# EAGLE board PCB_OpenBook (EAGLE 9.7.0)
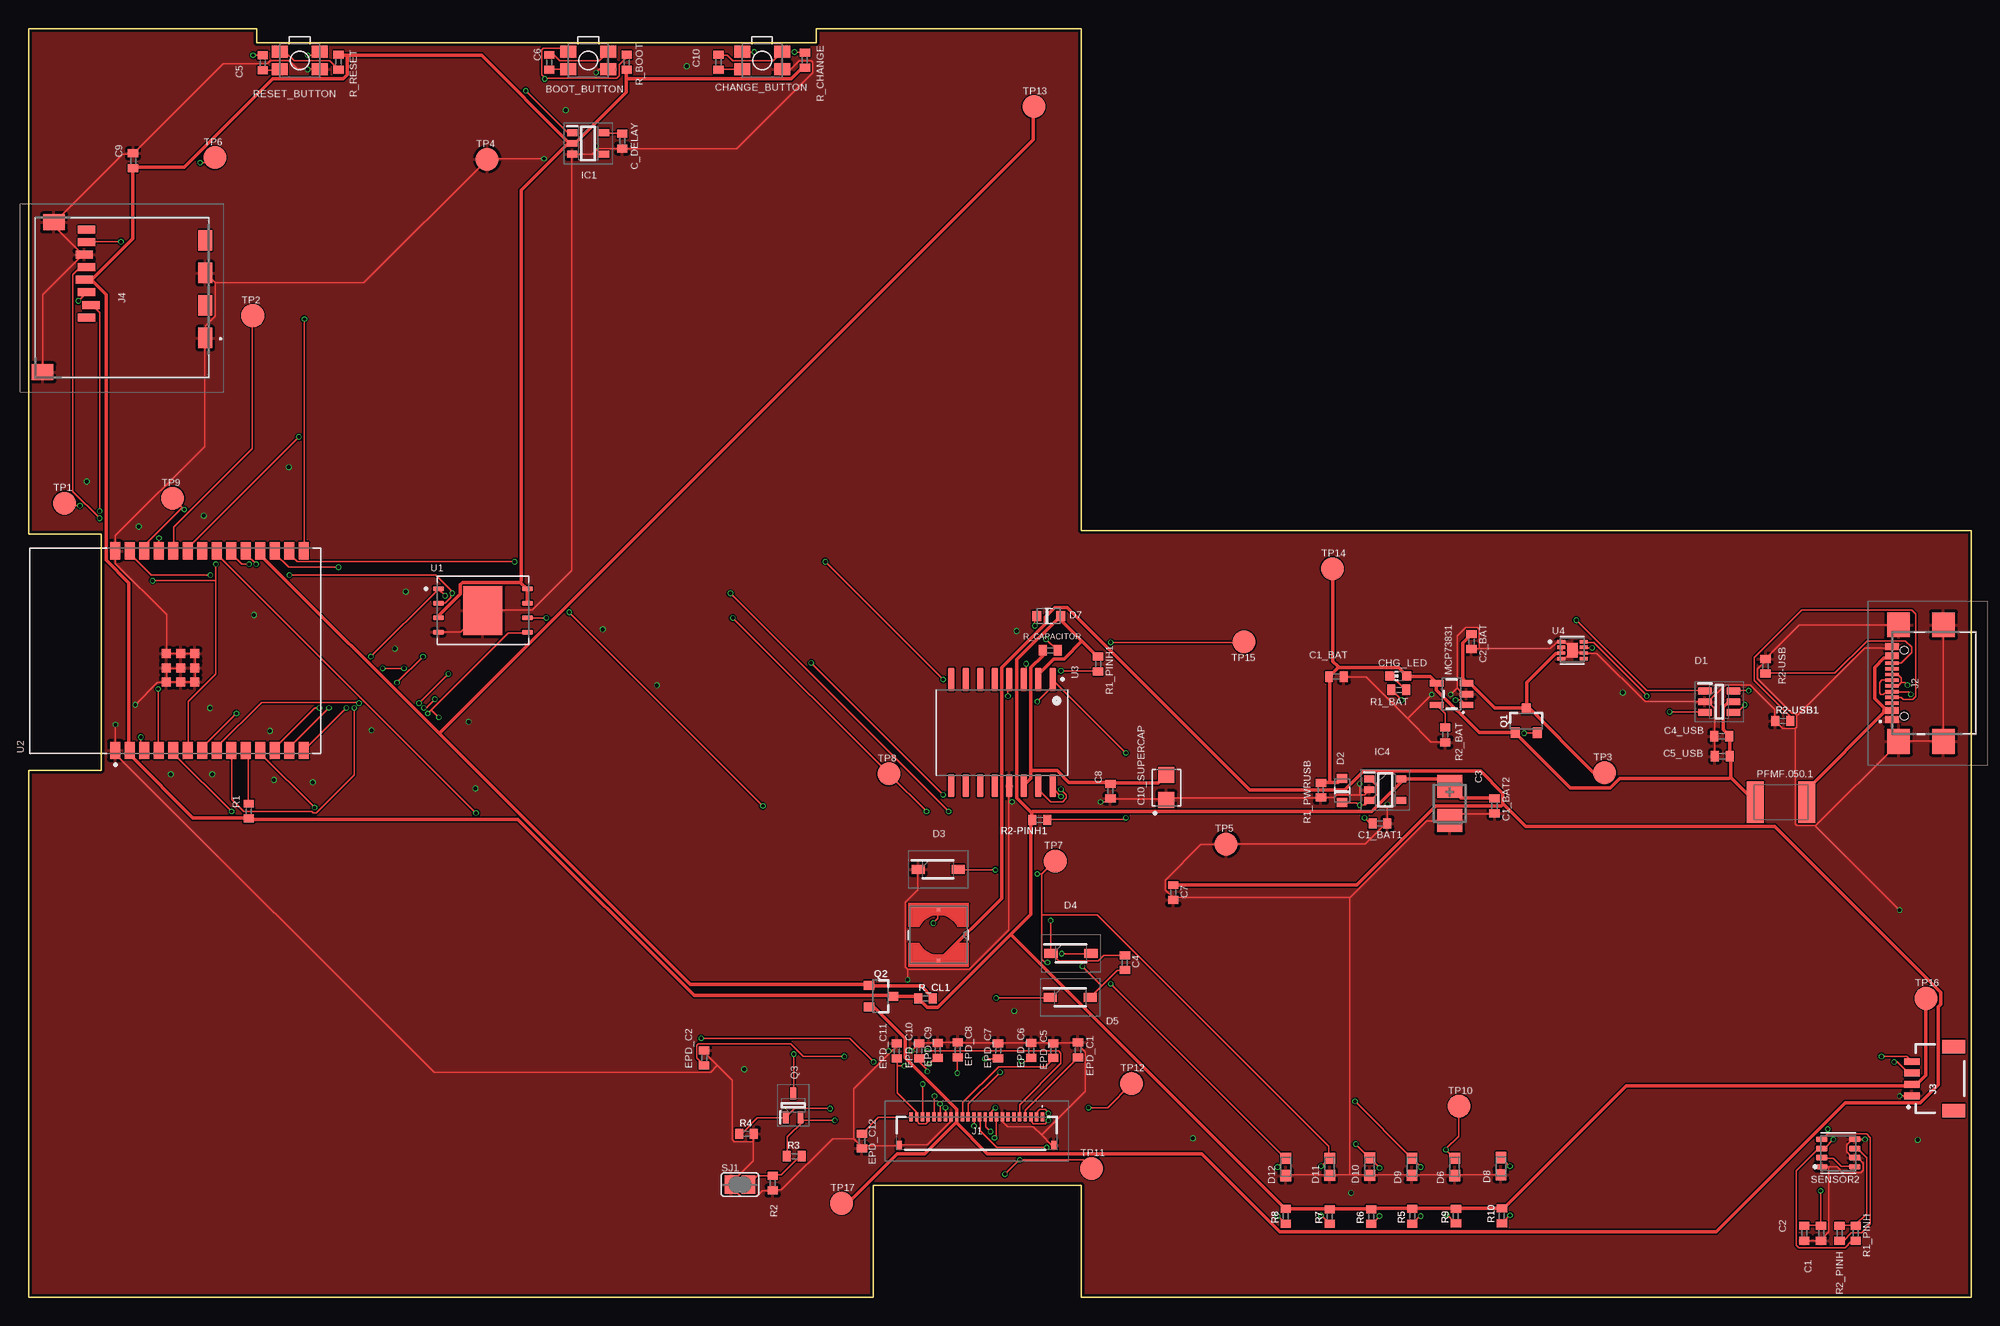
[diagram p0: board, top side]
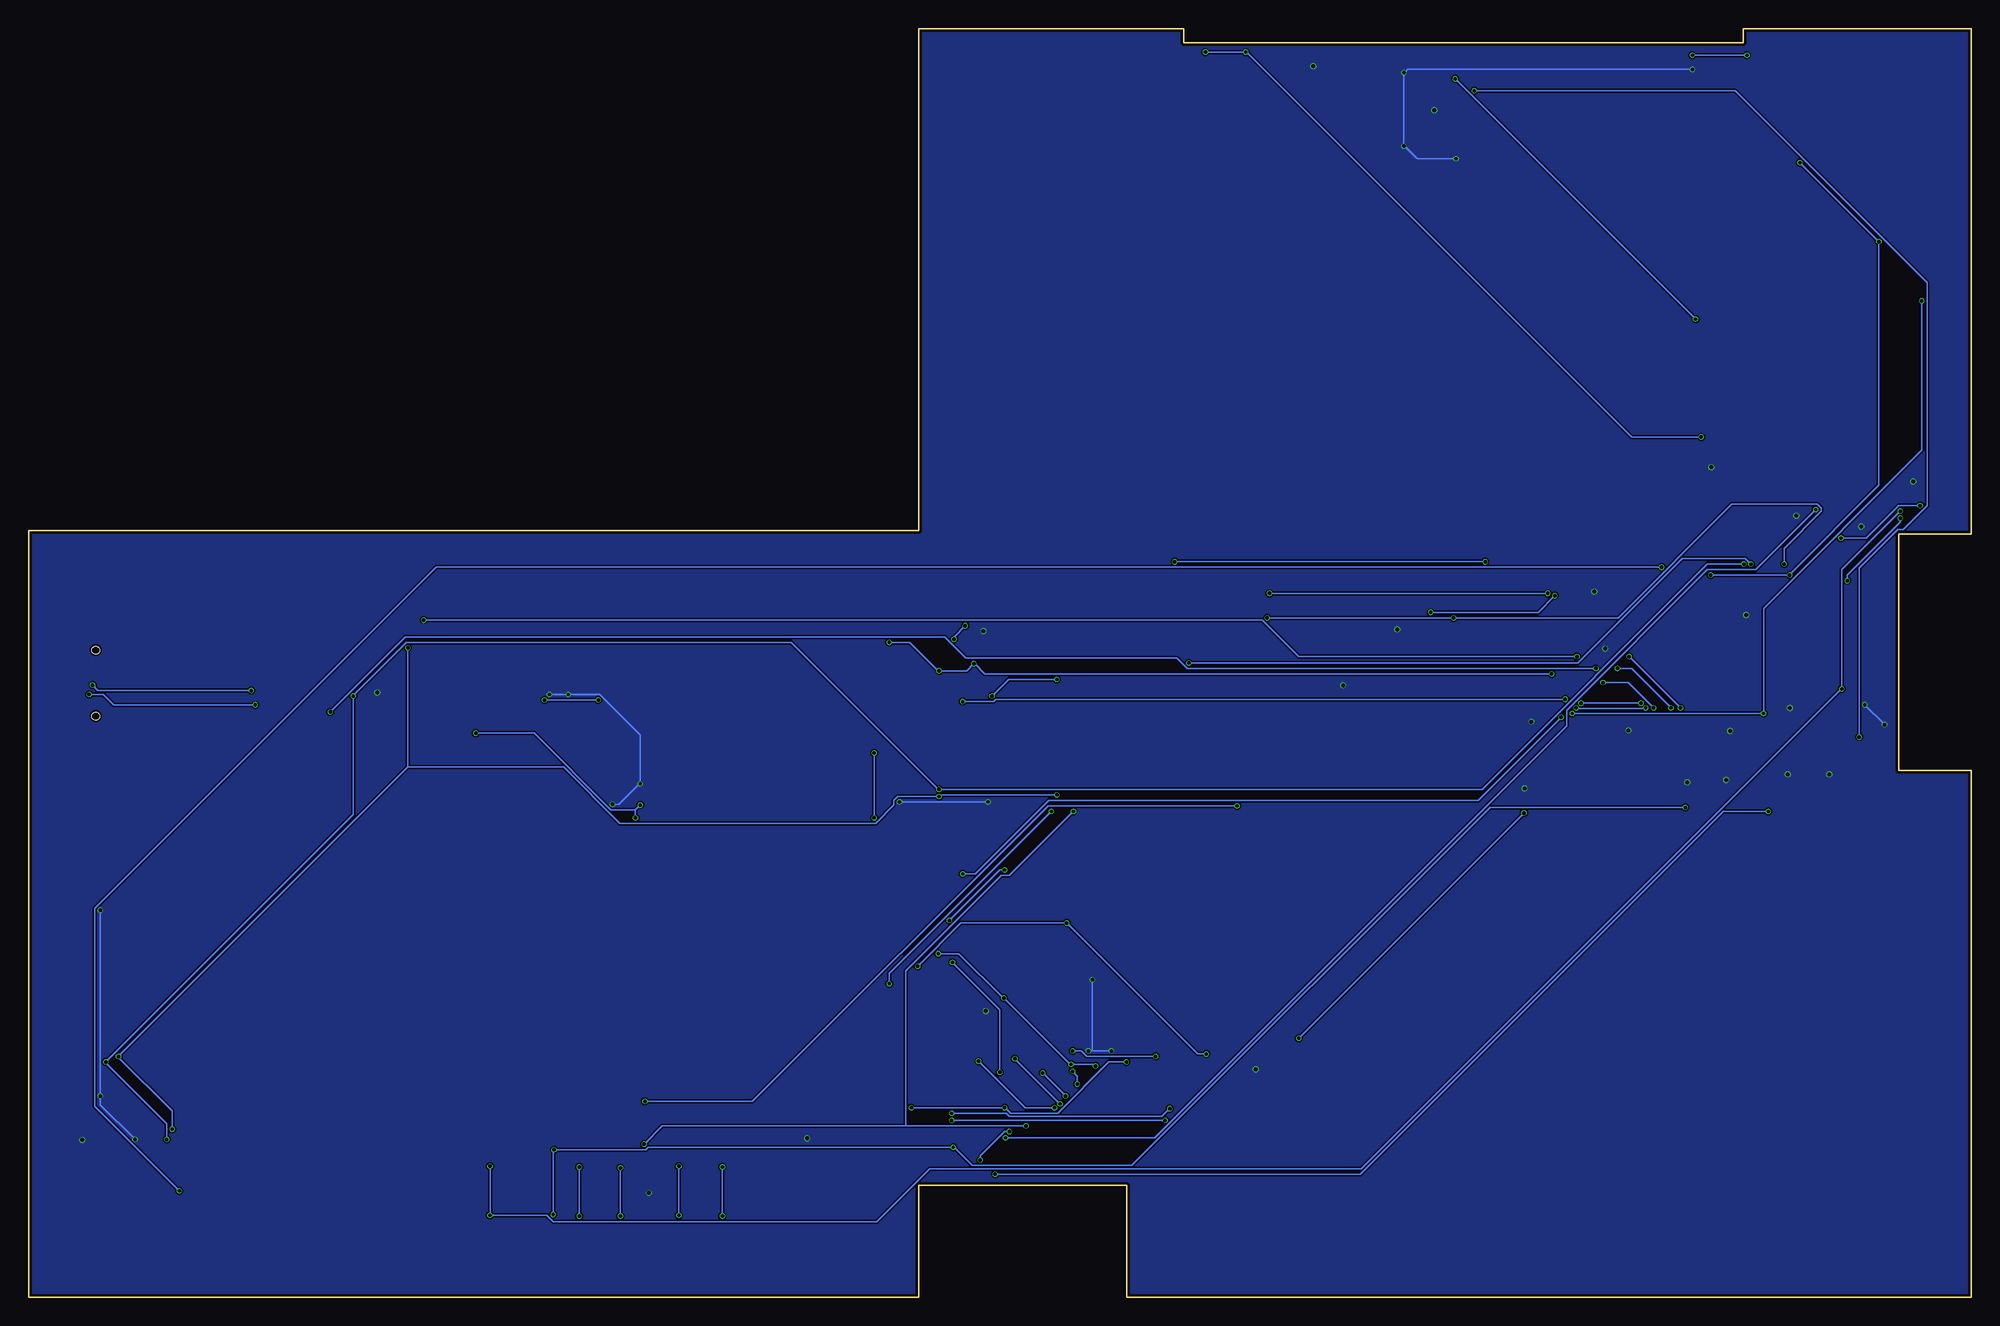
[diagram p1: board, bottom side, seen from below]

Size 170.2 x 111.2 mm. Coordinates in mm from the lower left corner, seen from the top.
Outline: 0,0 74,0 74,9.85 92.2,9.85 92.2,0 170.2,0 170.2,67.2 92.2,67.2 92.2,111.2 69.02,111.2 69.02,109.95 19.97,109.95 19.97,111.2 0,111.2 0,66.9 6.35,66.9 6.35,46.19 0,46.19 0,0
Copper layers (1*16): Top 0.035mm / dielectric 1.6mm / Bottom 0.035mm
Design rules "jlcpcb-2layers.dru": minimum track width 5mil, minimum drill 0.3mm, track to track 5mil, track to pad 5mil, pad to pad 5mil, via to via 5mil, smd to smd 5mil, copper to edge 0.2mm, drill to drill 6mil, minimum pad ring 10mil, minimum via ring 3mil, stop-mask expansion 4mil, vias tented up to drill 0mil, thermal gap 10mil
Net classes: 0 default: width 0.15 mm; 1 POWER: width 0.3 mm

## Footprints (pad centres in the part's own frame; a part is rotated, then mirrored left to right if it is on the bottom)
MYBUTTON = smd 1.4 x 1.05: 1 1.75,0.75; 2 -1.75,0.75; 3 -1.75,-0.75; 4 1.75,-0.75
ESP32_WROVER_EAGLE-LTSPICE_C0402 = smd 0.7 x 0.9: 1 -0.65,0; 2 0.65,0
RCL_CT3528 = smd 2 x 2.2: + -1.5,0; - 1.5,0
CAPCP3225X100N = smd 1.4 x 1.4: 1 -1.1,0; 2 1.1,0
ADAFRUIT_CHIP-LED0603 = smd 0.8 x 0.8: A 0,-0.75; C 0,0.75
SOT95P280X145-6N = smd 1.2 x 0.6: 1 -1.25,0.95; 2 -1.25,0; 3 -1.25,-0.95; 4 1.25,-0.95; 5 1.25,0; 6 1.25,0.95
ESP32_WROVER_AVX---SD0805S020S1R0_AVX_SD0805S020S1R0_0 = smd 0.8 x 0.9: 1 -1.05,0; 2 1.05,0
SOD3716X135N = smd 1.15 x 0.8: 1 -1.75,0; 2 1.75,0
DIOC1608X36N = smd 0.97 x 0.94: 1 -0.75,0; 2 0.75,0
SOT95P280X120-5N = smd 0.9 x 0.6: 1 -1.4,0.95; 2 -1.4,0; 3 -1.4,-0.95; 4 1.4,-0.95; 5 1.4,0.95
FH34SRJ24S05SH99 = smd 0.3 x 0.8: 1 5.75,1.45; 2 5.25,1.45; 3 4.75,1.45; 4 4.25,1.45; 5 3.75,1.45; 6 3.25,1.45; 7 2.75,1.45; 8 2.25,1.45; 9 1.75,1.45; 10 1.25,1.45; 11 0.75,1.45; 12 0.25,1.45; 13 -0.25,1.45; 14 -0.75,1.45; 15 -1.25,1.45; 16 -1.75,1.45; 17 -2.25,1.45; 18 -2.75,1.45; 19 -3.25,1.45; 20 -3.75,1.45; 21 -4.25,1.45; 22 -4.75,1.45; 23 -5.25,1.45; 24 -5.75,1.45 | smd 0.4 x 0.8: MP1 6.75,-1.05; MP2 -6.75,-1.05
SAMACSYS_PARTS_USB4110GFA = smd 0.3 x 1.15: A1 -3.35,3.678; A4 -2.55,3.678; A5 -1.25,3.678; A6 -0.25,3.678; A7 0.25,3.678; A8 1.25,3.678; A9 2.55,3.678; A12 3.35,3.678; B1 3.05,3.678; B4 2.25,3.678; B5 1.75,3.678; B6 0.75,3.678; B7 -0.75,3.678; B8 -1.75,3.678; B9 -2.25,3.678; B12 -3.05,3.678 | smd 2.18 x 2: MP1 -5.11,-0.827; MP2 5.11,-0.827; MP3 -5.11,3.103; MP4 5.11,3.103 | hole 0.65: -2.89,2.603; 2.89,2.603
JST04_1MM_RA = smd 0.6 x 1.35: 1 -1.5,0; 2 -0.5,0; 3 0.5,0; 4 1.5,0 | smd 1.2 x 2: NC1 2.8,-3.675; NC2 -2.8,-3.675
112ATAARR03ATTEND = smd 1.8 x 1.2: G1 10.6,10.4; G2 4.9,10.4; S1 7.75,10.4; S2 2.05,10.4 | smd 1.4 x 1.9: G3 13.6,-3.85; G4 0.45,-2.85 | smd 0.7 x 1.5: P1 8.8,0; P2 7.7,0.4; P3 6.6,0; P4 5.5,-0.2; P5 4.4,0; P6 3.3,-0.2; P7 2.2,0; P8 1.1,0
IND_4828-WE-TPC_WRE = smd 0.33 x 0.33: 1 -2.286,0; 2 2.286,0
ESP32_WROVER_SPARKFUN-IC-POWER_SOT23-5 = smd 0.55 x 1.2: 1 -0.95,-1.3; 2 0,-1.3; 3 0.95,-1.3; 4 0.95,1.3; 5 -0.95,1.3
ESP32C6_VARISTOR_CT/CN1812 = smd 1.5 x 3.6: 1 -2.25,0; 2 2.25,0
ESP32_WROVER_SPARKFUN-DISCRETESEMI_SOT23-3 = smd 0.8 x 0.9: 1 -0.95,-1; 2 0.95,-1; 3 0,1.1
SOT65P210X110-3N = smd 1.05 x 0.5: 1 -1.05,0.65; 2 -1.05,-0.65; 3 1.05,0
ESP32_WROVER_EAGLE-LTSPICE_R0402 = smd 0.7 x 0.9: 1 -0.65,0; 2 0.65,0
ESP32_WROVER_BME680_PSON80P300X300X100-8N = smd 1.016 x 0.5: 1 1.458,1.2; 2 1.458,0.4; 3 1.458,-0.4; 4 1.458,-1.2; 5 -1.458,-1.22; 6 -1.458,-0.4; 7 -1.458,0.4; 8 -1.458,1.2
SJ = smd 1.168 x 1.6: 1 -0.762,0; 2 0.762,0
TP20R = smd 2 x 2: TP 0,0
SON127P600X800X80-9N = smd 0.94 x 0.44: 1 -3.895,1.905; 2 -3.895,0.635; 3 -3.895,-0.635; 4 -3.895,-1.905; 5 3.895,-1.905; 6 3.895,-0.635; 7 3.895,0.635; 8 3.895,1.905 | smd 3.4 x 4.3: 9 0,0
XCVR_ESP32-C6-WROOM-1-N8 = smd 1.5 x 0.9: 1 -8.75,5.26; 2 -8.75,3.99; 3 -8.75,2.72; 4 -8.75,1.45; 5 -8.75,0.18; 6 -8.75,-1.09; 7 -8.75,-2.36; 8 -8.75,-3.63; 9 -8.75,-4.9; 10 -8.75,-6.17; 11 -8.75,-7.44; 12 -8.75,-8.71; 13 -8.75,-9.98; 14 -8.75,-11.25; 15 8.75,-11.25; 16 8.75,-9.98; 17 8.75,-8.71; 18 8.75,-7.44; 19 8.75,-6.17; 20 8.75,-4.9; 21 8.75,-3.63; 22 8.75,-2.36; 23 8.75,-1.09; 24 8.75,0.18; 25 8.75,1.45; 26 8.75,2.72; 27 8.75,3.99; 28 8.75,5.26 | smd 0.8 x 0.8: 29_1 -2.755,0.79; 29_2 -1.505,0.79; 29_3 -0.255,0.79; 29_4 -2.755,-0.46; 29_5 -1.505,-0.46; 29_6 -0.255,-0.46; 29_7 -2.755,-1.71; 29_8 -1.505,-1.71; 29_9 -0.255,-1.71
SOIC127P1032X265-16N = smd 2.05 x 0.59: 1 -4.655,4.445; 2 -4.655,3.175; 3 -4.655,1.905; 4 -4.655,0.635; 5 -4.655,-0.635; 6 -4.655,-1.905; 7 -4.655,-3.175; 8 -4.655,-4.445; 9 4.655,-4.445; 10 4.655,-3.175; 11 4.655,-1.905; 12 4.655,-0.635; 13 4.655,0.635; 14 4.655,1.905; 15 4.655,3.175; 16 4.655,4.445
SON50P200X200X80-9N = smd 0.76 x 0.27: 1 -0.985,0.75; 2 -0.985,0.25; 3 -0.985,-0.25; 4 -0.985,-0.75; 5 0.985,-0.75; 6 0.985,-0.25; 7 0.985,0.25; 8 0.985,0.75 | smd 0.9 x 1.3: 9 0,0

## Placement (x,y rotation side)
BOOT_BUTTON  BUTTON_CUSYOMV1  [MYBUTTON]  49.03,108.4 180 top
C1  100nF  [ESP32_WROVER_EAGLE-LTSPICE_C0402]  157.03,5.62 270 top
C1_BAT  4.7uF  [ESP32_WROVER_EAGLE-LTSPICE_C0402]  114.57,54.4 0 top
C1_BAT1  4.7uF  [ESP32_WROVER_EAGLE-LTSPICE_C0402]  118.39,41.54 0 top
C1_BAT2  4.7uF  [ESP32_WROVER_EAGLE-LTSPICE_C0402]  128.42,43.07 270 top
C2  100nF  [ESP32_WROVER_EAGLE-LTSPICE_C0402]  155.55,5.62 270 top
C2_BAT  4.7uF  [ESP32_WROVER_EAGLE-LTSPICE_C0402]  126.4,57.47 270 top
C3  100uF TANT  [RCL_CT3528]  124.5,43.29 270 top
C4  4.7uF/25V  [ESP32_WROVER_EAGLE-LTSPICE_C0402]  96.04,29.34 270 top
C4_USB  100nF  [ESP32_WROVER_EAGLE-LTSPICE_C0402]  148.33,49.18 180 top
C5  1uF  [ESP32_WROVER_EAGLE-LTSPICE_C0402]  20.51,108.19 270 top
C5_USB  4.7uF  [ESP32_WROVER_EAGLE-LTSPICE_C0402]  148.37,47.43 180 top
C6  100nF  [ESP32_WROVER_EAGLE-LTSPICE_C0402]  45.62,108.23 270 top
C7  10uF  [ESP32_WROVER_EAGLE-LTSPICE_C0402]  100.28,35.48 270 top
C8  100nF  [ESP32_WROVER_EAGLE-LTSPICE_C0402]  94.77,44.37 270 top
C9  100nF  [ESP32_WROVER_EAGLE-LTSPICE_C0402]  9.16,99.61 90 top
C10  100nF  [ESP32_WROVER_EAGLE-LTSPICE_C0402]  60.44,108.25 270 top
C10_SUPERCAP  CPH3225A  [CAPCP3225X100N]  99.68,44.68 90 top
C_DELAY  100nF  [ESP32_WROVER_EAGLE-LTSPICE_C0402]  52,101.33 270 top
CHANGE_BUTTON  BUTTON_CUSYOMV1  [MYBUTTON]  64.26,108.4 180 top
CHG_LED  [ADAFRUIT_CHIP-LED0603]  119.98,54.46 90 top
D1  USBLC6-2SC6Y  [SOT95P280X145-6N]  148.1,52.2 0 top
D2  ESP32_WROVER_AVX---SD0805S020S1R0_AVX_SD0805S020S1R0_0_0AVX_SD0805S020S1R0_0_0  [ESP32_WROVER_AVX---SD0805S020S1R0_AVX_SD0805S020S1R0_0]  115.07,44.43 90 top
D3  MBR0530  [SOD3716X135N]  79.68,37.51 0 top
D4  MBR0530  [SOD3716X135N]  91.32,30.16 0 top
D5  MBR0530  [SOD3716X135N]  91.25,26.29 0 top
D6  PGB1010603MR  [DIOC1608X36N]  124.93,11.43 90 top
D7  ESP32_WROVER_AVX---SD0805S020S1R0_AVX_SD0805S020S1R0_0_0AVX_SD0805S020S1R0_0_0  [ESP32_WROVER_AVX---SD0805S020S1R0_AVX_SD0805S020S1R0_0]  89.37,59.72 0 top
D8  PGB1010603MR  [DIOC1608X36N]  128.98,11.51 90 top
D9  PGB1010603MR  [DIOC1608X36N]  121.18,11.44 90 top
D10  PGB1010603MR  [DIOC1608X36N]  117.48,11.47 90 top
D11  PGB1010603MR  [DIOC1608X36N]  113.98,11.45 90 top
D12  PGB1010603MR  [DIOC1608X36N]  110.13,11.43 90 top
EPD_C1  1uF/50V  [ESP32_WROVER_EAGLE-LTSPICE_C0402]  91.93,21.69 90 top
EPD_C2  1uF/50V  [ESP32_WROVER_EAGLE-LTSPICE_C0402]  59.18,21 90 top
EPD_C5  0.1uF/50V  [ESP32_WROVER_EAGLE-LTSPICE_C0402]  89.77,21.63 90 top
EPD_C6  1uF/50V  [ESP32_WROVER_EAGLE-LTSPICE_C0402]  87.83,21.65 90 top
EPD_C7  1uF/50V  [ESP32_WROVER_EAGLE-LTSPICE_C0402]  84.93,21.62 90 top
EPD_C8  1uF/50V  [ESP32_WROVER_EAGLE-LTSPICE_C0402]  81.4,21.7 90 top
EPD_C9  1uF/50V  [ESP32_WROVER_EAGLE-LTSPICE_C0402]  79.65,21.66 90 top
EPD_C10  1uF/50V  [ESP32_WROVER_EAGLE-LTSPICE_C0402]  78.03,21.62 90 top
EPD_C11  1uF/50V  [ESP32_WROVER_EAGLE-LTSPICE_C0402]  76.06,21.6 90 top
EPD_C12  1uF/50V  [ESP32_WROVER_EAGLE-LTSPICE_C0402]  73.01,13.7 270 top
IC1  XC6220A331MR-G  [SOT95P280X120-5N]  49.02,101.13 0 top
IC4  XC6220A331MR-G  [SOT95P280X120-5N]  118.85,44.49 0 top
J1  FH34SRJ-24S-0.5SH_99_  [FH34SRJ24S05SH99]  83.06,14.39 0 top
J2  SAMACSYS_PARTS_USB4110-GF-A  [SAMACSYS_PARTS_USB4110GFA]  166.92,53.84 90 top
J3  QWIIC_RIGHT_ANGLE  [JST04_1MM_RA]  164.97,19.17 90 top
J4  112A-TAAR-R03_ATTEND  [112ATAARR03ATTEND]  5.08,94.68 270 top
L1  68uH  [IND_4828-WE-TPC_WRE]  79.71,31.77 270 top
MCP73831  ESP32_WROVER_SPARKFUN-IC-POWER_MCP73831  [ESP32_WROVER_SPARKFUN-IC-POWER_SOT23-5]  124.66,52.87 90 top
PFMF.050.1  ESP32C6_VARISTORCN1812  [ESP32C6_VARISTOR_CT/CN1812]  153.51,43.4 180 top
Q1  20V/4.2A/52mΩ/1.4W  [ESP32_WROVER_SPARKFUN-DISCRETESEMI_SOT23-3]  131.2,50.5 0 top
Q2  20V/4.2A/52mΩ/1.4W  [ESP32_WROVER_SPARKFUN-DISCRETESEMI_SOT23-3]  74.63,26.4 270 top
Q3  SI1308EDL-T1-GE3  [SOT65P210X110-3N]  66.98,16.83 90 top
R1  10K  [ESP32_WROVER_EAGLE-LTSPICE_R0402]  19.3,42.62 90 top
R1_BAT  200  [ESP32_WROVER_EAGLE-LTSPICE_R0402]  120.04,53.25 0 top
R1_PINH  10K  [ESP32_WROVER_EAGLE-LTSPICE_R0402]  160.07,5.62 90 top
R1_PINH1  10K  [ESP32_WROVER_EAGLE-LTSPICE_R0402]  93.69,55.51 90 top
R1_PWRUSB  100K  [ESP32_WROVER_EAGLE-LTSPICE_R0402]  113.21,44.45 90 top
R2  2.2  [ESP32_WROVER_EAGLE-LTSPICE_R0402]  65.19,10.02 90 top
R2-PINH1  10K  [ESP32_WROVER_EAGLE-LTSPICE_R0402]  88.58,41.85 180 top
R2-USB  5k1  [ESP32_WROVER_EAGLE-LTSPICE_R0402]  152.16,55.31 90 top
R2-USB1  5k1  [ESP32_WROVER_EAGLE-LTSPICE_R0402]  153.66,50.52 0 top
R2_BAT  2K  [ESP32_WROVER_EAGLE-LTSPICE_R0402]  124.1,49.3 90 top
R2_PINH  10K  [ESP32_WROVER_EAGLE-LTSPICE_R0402]  158.65,5.62 90 top
R3  0.47  [ESP32_WROVER_EAGLE-LTSPICE_R0402]  67.09,12.38 0 top
R4  10K  [ESP32_WROVER_EAGLE-LTSPICE_R0402]  62.9,14.33 0 top
R5  10K  [ESP32_WROVER_EAGLE-LTSPICE_R0402]  121.22,7.12 90 top
R6  10K  [ESP32_WROVER_EAGLE-LTSPICE_R0402]  117.62,7.09 90 top
R7  10K  [ESP32_WROVER_EAGLE-LTSPICE_R0402]  113.99,7.09 90 top
R8  10K  [ESP32_WROVER_EAGLE-LTSPICE_R0402]  110.14,7.11 90 top
R9  10K  [ESP32_WROVER_EAGLE-LTSPICE_R0402]  125.04,7.13 90 top
R10  10K  [ESP32_WROVER_EAGLE-LTSPICE_R0402]  129.07,7.16 90 top
R_BOOT  10K  [ESP32_WROVER_EAGLE-LTSPICE_R0402]  52.41,108.24 90 top
R_CAPACITOR  15  [ESP32_WROVER_EAGLE-LTSPICE_R0402]  89.5,56.71 0 top
R_CHANGE  10K  [ESP32_WROVER_EAGLE-LTSPICE_R0402]  68.01,108.42 90 top
R_CL1  10K  [ESP32_WROVER_EAGLE-LTSPICE_R0402]  78.58,26.2 0 top
R_RESET  10K  [ESP32_WROVER_EAGLE-LTSPICE_R0402]  27.15,108.26 270 top
RESET_BUTTON  BUTTON_CUSYOMV1  [MYBUTTON]  23.76,108.4 180 top
SENSOR2  BME688  [ESP32_WROVER_BME680_PSON80P300X300X100-8N]  158.53,12.65 180 top
SJ1  [SJ]  62.32,9.89 0 top
TP1  TPTP20R  [TP20R]  3.14,69.61 0 top
TP2  TPTP20R  [TP20R]  19.64,86.04 0 top
TP3  TPTP20R  [TP20R]  138.06,45.99 0 top
TP4  TPTP20R  [TP20R]  40.18,99.74 0 top
TP5  TPTP20R  [TP20R]  104.9,39.74 0 top
TP6  TPTP20R  [TP20R]  16.32,99.89 0 top
TP7  TPTP20R  [TP20R]  89.94,38.24 0 top
TP8  TPTP20R  [TP20R]  75.36,45.89 0 top
TP9  TPTP20R  [TP20R]  12.63,70.04 0 top
TP10  TPTP20R  [TP20R]  125.32,16.76 0 top
TP11  TPTP20R  [TP20R]  93.12,11.31 0 top
TP12  TPTP20R  [TP20R]  96.62,18.76 0 top
TP13  TPTP20R  [TP20R]  88.07,104.36 0 top
TP14  TPTP20R  [TP20R]  114.22,63.86 0 top
TP15  TPTP20R  [TP20R]  106.48,57.44 180 top
TP16  TPTP20R  [TP20R]  166.22,26.21 0 top
TP17  TPTP20R  [TP20R]  71.22,8.25 0 top
U1  W25Q512JVEIQ  [SON127P600X800X80-9N]  39.8,60.2 0 top
U2  ESP32-C6-WROOM-1-N8  [XCVR_ESP32-C6-WROOM-1-N8]  12.86,56.68 90 top
U3  DS3231SN#  [SOIC127P1032X265-16N]  85.28,49.49 270 top
U4  MAX17048G+T10  [SON50P200X200X80-9N]  135.24,56.72 0 top

## Library data of the parts
BOOT_BUTTON CHANGE_BUTTON CHG_LED PFMF.050.1 RESET_BUTTON SJ1 TP2-TP17 = DeskAssistant v19 v1
C1 C1_BAT C1_BAT1 C1_BAT2 C2 C2_BAT C4 C4_USB C5 C5_USB C6-C10 C_DELAY EPD_C1 EPD_C2 EPD_C5-EPD_C12 = DeskAssistant v19 v1; SPICEMODEL: NONE; SPICEPREFIX: C
C3 = DeskAssistant v19 v1; SPICEPREFIX: C
C10_SUPERCAP = DeskAssistant v19 v1; AVAILABILITY: Not in stock; CHECK_PRICES: https://www.snapeda.com/parts/CPH3225A/Seiko+Instruments/view-part/?ref=eda; DESCRIPTION: 11 mF (EDLC) Supercapacitor 3.3 V 1210 (3225 Metric) - -; MF: Seiko Instruments; MP: CPH3225A; PACKAGE: 1210 Seiko; PRICE: None; PURCHASE-URL: https://www.snapeda.com/api/url_track_click_mouser/?unipart_id=562593&manufacturer=Seiko Instruments&part_name=CPH3225A&search_term=None; SNAPEDA_LINK: https://www.snapeda.com/parts/CPH3225A/Seiko+Instruments/view-part/?ref=snap
D1 = DeskAssistant v19 v1; AVAILABILITY: In Stock; CHECK_PRICES: https://www.snapeda.com/parts/USBLC6-2SC6Y/STMicroelectronics/view-part/?ref=eda; DESCRIPTION: 17V Clamp 5A (8/20µs) Ipp Tvs Diode Surface Mount SOT-23-6; MF: STMicroelectronics; MP: USBLC6-2SC6Y; PACKAGE: SOT-23-6 STMicroelectronics; PRICE: None; SNAPEDA_LINK: https://www.snapeda.com/parts/USBLC6-2SC6Y/STMicroelectronics/view-part/?ref=snap
D2 D7 = DeskAssistant v19 v1; CENTROID_NOT_SPECIFIED: No; DATASHEET: http://datasheets.avx.com/schottky.pdf; DIGIKEY_DESCRIPTION: DIODE SCHOTTKY 20V 1A 0805; DIGIKEY_PART_NUMBER: 478-7800-1-ND; LEAD_FREE: yes; MF: AVX; MOUSER_PART_NUMBER: 581-SD0805S020S1R0; PACKAGE: 0805 (2012 metric); PREFIX: D; ROHS: yes; TEMPERATURE_RANGE_HIGH: +125°C; TEMPERATURE_RANGE_LOW: -55°C
D3-D5 = DeskAssistant v19 v1; AVAILABILITY: In Stock; CHECK_PRICES: https://www.snapeda.com/parts/MBR0530/Onsemi/view-part/?ref=eda; DESCRIPTION: Diode Schottky 30 V 500mA Surface Mount SOD-123; MF: ON Semiconductor; MP: MBR0530; PACKAGE: SOD-123-2 ON Semiconductor; PRICE: None; PURCHASE-URL: https://www.snapeda.com/api/url_track_click_mouser/?unipart_id=179458&manufacturer=ON Semiconductor&part_name=MBR0530&search_term=None; SNAPEDA_LINK: https://www.snapeda.com/parts/MBR0530/Onsemi/view-part/?ref=snap
D6 D8-D12 = DeskAssistant v19 v1; AVAILABILITY: In Stock; CHECK_PRICES: https://www.snapeda.com/parts/PGB1010603MR/Littelfuse/view-part/?ref=eda; DESCRIPTION: 150V (Typ) Clamp - Ipp Tvs Diode Surface Mount 0603 (1608 Metric); MF: Littelfuse Inc.; MP: PGB1010603MR; PACKAGE: 0603 Littelfuse Inc.; PRICE: None; PURCHASE-URL: https://www.snapeda.com/api/url_track_click_mouser/?unipart_id=5659453&manufacturer=Littelfuse Inc.&part_name=PGB1010603MR&search_term=None; SNAPEDA_LINK: https://www.snapeda.com/parts/PGB1010603MR/Littelfuse/view-part/?ref=snap
IC1 = DeskAssistant v19 v1; DESCRIPTION: LDO Voltage Regulators; HEIGHT: 1.2mm; MANUFACTURER_NAME: Torex; MANUFACTURER_PART_NUMBER: BD5229G-TR; MOUSER_PART_NUMBER: 865-XC6220A331MR-G; MOUSER_PRICE-STOCK: https://www.mouser.co.uk/ProductDetail/Torex-Semiconductor/XC6220A331MR-G?qs=AsjdqWjXhJ8ZSWznL1J0gg%3D%3D
IC4 = DeskAssistant v19 v1; DESCRIPTION: LDO Voltage Regulators; HEIGHT: 1.2mm; MANUFACTURER_NAME: Torex; MANUFACTURER_PART_NUMBER: XC6220A331MR-G; MOUSER_PART_NUMBER: 865-XC6220A331MR-G; MOUSER_PRICE-STOCK: https://www.mouser.co.uk/ProductDetail/Torex-Semiconductor/XC6220A331MR-G?qs=AsjdqWjXhJ8ZSWznL1J0gg%3D%3D
J1 = DeskAssistant v19 v1; DESCRIPTION: 24 Position FFC, FPC Connector Contacts, Top and Bottom 0.020" (0.50mm) Surface Mount, Right Angle; HEIGHT: 1.1mm; MANUFACTURER_NAME: Hirose; MANUFACTURER_PART_NUMBER: FH34SRJ-24S-0.5SH(99); MOUSER_PART_NUMBER: 798-FH34SRJ24S05SH99; MOUSER_PRICE-STOCK: https://www.mouser.co.uk/ProductDetail/Hirose-Connector/FH34SRJ-24S-0.5SH99?qs=vcbW%252B4%252BSTIpKBl5ap9J8Fw%3D%3D
J2 = DeskAssistant v19 v1; DESCRIPTION: CONN USB 2.0 TYPE-C R/A SMT; HEIGHT: 3.26mm; MANUFACTURER_NAME: GCT (GLOBAL CONNECTOR TECHNOLOGY); MANUFACTURER_PART_NUMBER: USB4110-GF-A; MOUSER_PART_NUMBER: 640-USB4110-GF-A; MOUSER_PRICE-STOCK: https://www.mouser.co.uk/ProductDetail/GCT/USB4110-GF-A?qs=KUoIvG%2F9IlYiZvIXQjyJeA%3D%3D
J3 = DeskAssistant v19 v1; PROD_ID: CONN-13694
J4 = DeskAssistant v19 v1; DESCRIPTION: Micro SD Card Socket, Push-Push Type, Top Mount, SMT, H=1.83mm, 10u; HEIGHT: 1.9mm; MANUFACTURER_NAME: ATTEND; MANUFACTURER_PART_NUMBER: 112A-TAAR-R03 ATTEND
L1 = DeskAssistant v19 v1; COPYRIGHT: Copyright (C) 2024 Ultra Librarian. All rights reserved.; MANUFACTURER_PART_NUMBER: 744043680; MFR_NAME: Wurth Electronics
MCP73831 = DeskAssistant v19 v1; PROD_ID: IC-09995
Q1 Q2 = DeskAssistant v19 v1; PROD_ID: TRAN-14388
Q3 = DeskAssistant v19 v1; AVAILABILITY: In Stock; CHECK_PRICES: https://www.snapeda.com/parts/SI1308EDL-T1-GE3/Vishay+Siliconix/view-part/?ref=eda; DESCRIPTION: Si1308EDL-T1-GE3 N-channel MOSFET Transistor, 1.5 A, 30 V, 3-Pin SC-70 | Siliconix / Vishay SI1308EDL-T1-GE3; MF: Vishay Siliconix; MP: SI1308EDL-T1-GE3; PACKAGE: SOT-323 Vishay Semiconductor; PRICE: None; PURCHASE-URL: https://www.snapeda.com/api/url_track_click_mouser/?unipart_id=274603&manufacturer=Vishay Siliconix&part_name=SI1308EDL-T1-GE3&search_term=None; SNAPEDA_LINK: https://www.snapeda.com/parts/SI1308EDL-T1-GE3/Vishay+Siliconix/view-part/?ref=snap
R1 R1_BAT R1_PINH R1_PINH1 R1_PWRUSB R2 R2-PINH1 R2-USB R2-USB1 R2_BAT R2_PINH R3-R10 R_BOOT R_CAPACITOR R_CHANGE R_CL1 R_RESET = DeskAssistant v19 v1; SPICEMODEL: NONE; SPICEPREFIX: R
SENSOR2 = DeskAssistant v19 v1; AVAILABILITY: Unavailable; DESCRIPTION: Integrated Environmental Unit; MF: Bosch Sensortec; MP: BME680; PACKAGE: LGA-8 Bosch Tools; PRICE: None
TP1 = DeskAssistant v19 v1; 3D_NAME: TX
U1 = DeskAssistant v19 v1; AVAILABILITY: In Stock; CHECK_PRICES: https://www.snapeda.com/parts/W25Q512JVEIQ/Winbond+Electronics/view-part/?ref=eda; DESCRIPTION: FLASH - NOR Memory IC 512Mb (64M x 8) SPI - Quad I/O 133 MHz 8-WSON (8x6); MF: Winbond Electronics; MP: W25Q512JVEIQ; PACKAGE: Package; PRICE: None; SNAPEDA_LINK: https://www.snapeda.com/parts/W25Q512JVEIQ/Winbond+Electronics/view-part/?ref=snap
U2 = DeskAssistant v19 v1; AVAILABILITY: In Stock; CHECK_PRICES: https://www.snapeda.com/parts/ESP32-C6-WROOM-1-N8/Espressif+Systems/view-part/?ref=eda; DESCRIPTION: Multiprotocol Modules ESP32-C6 module, Wi-Fi 6 in 2.4 GHz band, Bluetooth 5, Zigbee 3.0 and Thread. ESP34-WROOM Compatible - ENGINEERING SAMPLE; MF: Espressif Systems; MP: ESP32-C6-WROOM-1-N8; PACKAGE: None; PRICE: None; SNAPEDA_LINK: https://www.snapeda.com/parts/ESP32-C6-WROOM-1-N8/Espressif+Systems/view-part/?ref=snap
U3 = DeskAssistant v19 v1; AVAILABILITY: In Stock; CHECK_PRICES: https://www.snapeda.com/parts/DS3231SN%23/Analog+Devices/view-part/?ref=eda; DESCRIPTION: Extremely Accurate I²C-Integrated RTC/TCXO/Crystal; MF: Analog Devices; MP: DS3231SN#; PACKAGE: SOIC-16 Maxim; PRICE: None; PURCHASE-URL: https://www.snapeda.com/api/url_track_click_mouser/?unipart_id=99048&manufacturer=Analog Devices&part_name=DS3231SN#&search_term=None; SNAPEDA_LINK: https://www.snapeda.com/parts/DS3231SN%23/Analog+Devices/view-part/?ref=snap
U4 = DeskAssistant v19 v1; AVAILABILITY: In Stock; CHECK_PRICES: https://www.snapeda.com/parts/MAX17048G+T10/Analog+Devices/view-part/?ref=eda; DESCRIPTION: 3µA 1-Cell/2-Cell Fuel Gauge with ModelGauge; MF: Analog Devices; MP: MAX17048G+T10; PACKAGE: TDFN-8 Maxim; PRICE: None; PURCHASE-URL: https://www.snapeda.com/api/url_track_click_mouser/?unipart_id=329239&manufacturer=Analog Devices&part_name=MAX17048G+T10&search_term=None; SNAPEDA_LINK: https://www.snapeda.com/parts/MAX17048G+T10/Analog+Devices/view-part/?ref=snap

## Nets
3V3 [POWER]: C1_BAT2.1 C3.+ C9.1 D7.2 IC1.2 IC4.5 J3.2 J4.P4 Q2.3 R1.1 R1_PINH1.2 R2-PINH1.2 R5.2 R6.2 R7.2 R8.2 R9.2 R10.2 R_BOOT.1 R_CHANGE.1 R_CL1.1 R_RESET.1 TP16.TP U1.3 U1.7 U1.8 U2.2 U3.2
32KHZ: R2-PINH1.1 U2.9 U3.1
DN: D1.4 J2.A7 J2.B7
DP: D1.6 J2.A6 J2.B6
EPD_3V3 [POWER]: C7.1 J1.16 L1.2 Q2.2 TP17.TP
EPD_3V3_C [POWER]: Q2.1 R_CL1.2 TP13.TP U2.18
EPD_BUSY: J1.9 TP9.TP U2.26
EPD_CS: D6.2 J1.12 R9.1 TP10.TP U2.11
EPD_DC: J1.11 TP11.TP U2.5
EPD_RST: J1.10 TP12.TP U2.21
FLASH_CS: D9.2 R5.1 U1.1 U2.12
GDR: J1.2 Q3.1 R4.1
GND: BOOT_BUTTON.2 C1.2 C1_BAT1.2 C1_BAT2.2 C1_BAT.2 C2.2 C2_BAT.2 C3.- C4_USB.2 C5_USB.2 C7.2 C8.2 C9.2 C10_SUPERCAP.1 C_DELAY.2 CHANGE_BUTTON.2 D1.2 D3.1 D6.1 D8.1 D9.1 D10.1 D11.1 D12.1 EPD_C1.2 EPD_C2.2 EPD_C5.2 EPD_C6.2 EPD_C7.2 EPD_C8.2 EPD_C9.2 EPD_C10.2 EPD_C11.2 EPD_C12.2 IC1.3 IC4.2 J1.8 J1.17 J1.MP1 J1.MP2 J2.A1 J2.A12 J2.B1 J2.B12 J2.MP1 J2.MP2 J2.MP3 J2.MP4 J3.1 J4.G1 J4.G2 J4.G3 J4.G4 J4.P6 MCP73831.2 R1_PWRUSB.1 R2-USB1.1 R2-USB.2 R2.1 R2_BAT.1 R4.2 RESET_BUTTON.2 SENSOR2.1 SENSOR2.5 SENSOR2.7 SJ1.1 TP4.TP TP5.TP U1.4 U1.9 U2.1 U2.28 U2.29_1 U2.29_2 U2.29_3 U2.29_4 U2.29_5 U2.29_6 U2.29_7 U2.29_8 U2.29_9 U3.13 U4.1 U4.4 U4.6 U4.9
GPIO8: R1.2 U2.10
I2C_PW: C1.1 C2.1 U2.17
IC2_PW: R1_PINH.2 R2_PINH.2 SENSOR2.6
INT_RTC: R1_PINH1.1 TP15.TP U2.8 U3.3
IO/BOOT: BOOT_BUTTON.4 R_BOOT.2 U2.15
IO/CHANGE: CHANGE_BUTTON.4 R_CHANGE.2 U2.23
MISO: D12.2 J4.P7 R8.1 TP6.TP U1.2 U2.27
MOSI: D11.2 J1.14 J4.P3 R7.1 TP7.TP U1.5 U2.7
N$1: J2.B5 R2-USB.1
N$2: J2.A5 R2-USB1.2
N$3: C1_BAT1.1 D2.1 IC4.1 IC4.3 Q1.2
N$4: C10.1 CHANGE_BUTTON.3
N$5: C4.1 D3.2 D4.1
N$6: C10.2 CHANGE_BUTTON.1
N$7: SENSOR2.2 SENSOR2.8
N$8: MCP73831.5 R2_BAT.2
N$9: EPD_C12.1 J1.24
N$10: MCP73831.1 R1_BAT.1
N$11: CHG_LED.C R1_BAT.2
N$12: C_DELAY.1 IC1.5
N$13: EPD_C10.1 J1.22
N$14: D7.1 R_CAPACITOR.2
N$15: EPD_C8.1 J1.20
N$16: EPD_C7.1 J1.19
N$17: EPD_C1.1 J1.4
N$18: R_RESET.2 RESET_BUTTON.4
N$19: EPD_C6.1 J1.18
N$20: EPD_C2.1 J1.5
N$21: EPD_C5.1 J1.15
N$23: BOOT_BUTTON.1 C6.2
N$24: C5.2 RESET_BUTTON.1
N$25: BOOT_BUTTON.3 C6.1
N$26: C5.1 RESET_BUTTON.3
PREVGL: D4.2 D5.1 EPD_C9.1 EPD_C11.1 J1.21 J1.23
RESE: J1.3 Q3.2 R3.1
RESE': R2.2 R3.2 SJ1.2
RESET: IC1.1 U2.3
RTC_RST: U2.16 U3.4
RX: TP2.TP U2.24
SCK: D10.2 J1.13 J4.P5 R6.1 TP8.TP U1.6 U2.6
SCL: J3.4 R2_PINH.1 SENSOR2.4 U2.20 U3.16 U4.7
SDA: J3.3 R1_PINH.1 SENSOR2.3 U2.19 U3.15 U4.8
SRC: C4.2 D5.2 L1.1 Q3.3
SS_SD: D8.2 J4.P2 R10.1 U2.4
TX: TP1.TP U2.25
USB_D+: D1.1 U2.14
USB_D-: D1.3 U2.13
VBAT [POWER]: C2_BAT.1 MCP73831.3 Q1.3 TP3.TP U4.2 U4.3
VBUS [POWER]: C1_BAT.1 C4_USB.1 C5_USB.1 CHG_LED.A D1.5 D2.2 MCP73831.4 PFMF.050.1.2 Q1.1 R1_PWRUSB.2 TP14.TP
VRTC [POWER]: C8.1 C10_SUPERCAP.2 R_CAPACITOR.1 U3.14
VUSB [POWER]: J2.A4 J2.A9 J2.B4 J2.B9 PFMF.050.1.1

## Tracks (layer width: path | path; a pad name or v marks a point on that pad's centre or on a via)
3V3
  Top 0.3: 43.07,62.67 38.02,62.67 37.81,62.47 37.81,61.63 35.94,59.76 35.94,59.62 U1.3 | 43.07,62.67 43.63,62.12 U1.8 43.7,61.98 43.7,60.87 U1.7 | 52.35,106.78 52.35,107.55 R_BOOT.1 | 52.35,106.78 52.35,105.61 47.92,101.17 47.64,101.17 IC1.2 | 27.91,108.86 39.68,108.86 47.3,101.25 47.51,101.25 IC1.2 | 27.91,108.86 27.21,108.86 R_RESET.1 | 52.35,106.78 66.83,106.78 67.8,107.75 68,107.75 R_CHANGE.1 | 43.07,62.67 43.14,62.81 43.14,97.02 47.23,101.11 IC1.2 | 27.91,108.86 27.91,107.13 27.56,106.78 21.4,106.78 13.64,99.03 9.28,99.03 C9.1 9.14,98.96 9.14,92.8 5.54,89.19 4.92,89.19 J4.P4 5.61,89.06 6.79,87.88 6.79,64.61 8.79,62.6 8.79,48.06 U2.2 8.93,47.92 8.93,47.51 14.4,42.04 19.25,42.04 R1.1 19.39,41.9 42.87,41.9 58.31,26.45 75.62,26.45 Q2.3 75.76,26.39 77.77,26.39 77.91,26.25 R_CL1.1 78.05,26.11 78.74,25.42 79.64,25.42 86.04,31.82 | TP16.TP 166.2,26.18 166.2,19.46 165.44,18.7 165.02,18.7 J3.2 164.88,18.56 139.95,18.56 129.22,7.83 R10.2 129.01,7.83 125.14,7.83 R9.2 125,7.83 121.33,7.83 R5.2 121.19,7.83 117.72,7.83 R6.2 117.59,7.76 114.06,7.76 R7.2 113.85,7.76 110.18,7.76 R8.2 110.04,7.83 86.04,31.82 | C1_BAT2.1 128.39,43.77 125.48,43.77 124.58,44.67 C3.+ 124.44,44.81 123.82,45.43 120.29,45.43 IC4.5 120.22,45.29 120.22,45.15 117.66,42.59 87.95,42.59 87.88,42.45 | 87.88,42.45 87.88,41.9 R2-PINH1.2 87.81,41.76 87.81,33.59 86.04,31.82 | 87.88,42.45 86.56,43.77 86.56,55.89 90.37,59.69 D7.2 90.3,59.49 92.28,57.51 | 92.28,57.51 93.63,56.16 R1_PINH1.2 | 92.28,57.51 90.72,55.95 89.82,55.95 88.5,54.64 88.5,54.15 U3.2
32KHZ  (via drill 0.3)
  Top 0.15: v96.12,42.04 95.98,41.9 89.26,41.9 R2-PINH1.1 | v96.12,47.71 89.75,54.09 U3.1 89.96,53.81 v88.36,52.22 | v28.53,51.66 28.53,45.77 25.21,42.45 24.93,42.45 24.79,42.59 18.84,42.59 17.8,43.63 17.8,47.92 U2.9 | v34.62,51.66 34.83,51.66 v35.59,52.42
  Bottom 0.15: v96.12,47.71 v96.12,42.04 | v28.53,51.66 28.74,51.66 28.81,51.59 34.56,51.59 v34.62,51.66 | v35.59,52.42 85.45,52.42 85.66,52.22 v88.36,52.22
DN  (via drill 0.3)
  Top 0.15: v150.34,51.94 149.72,51.31 149.37,51.31 D1.4 | v164.89,52.85 164.69,53.05 163.28,53.05 J2.B7
  Top 0.152: J2.A7 162.34,54.09 162.15,53.9 162.15,52.95 162.25,52.85 162.49,52.85 162.58,52.94 163.09,52.94 J2.B7
  Bottom 0.15: v150.34,51.94 162.74,51.94 163.65,52.85 v164.89,52.85
DP  (via drill 0.3)
  Top 0.15: 164.05,53.88 163.78,53.6 163.29,53.6 J2.A6 | 164.05,53.88 164.05,54.29 163.78,54.57 163.29,54.57 J2.B6 | v150.69,53.19 149.37,53.19 D1.6 | v164.59,53.66 164.37,53.88 164.05,53.88
  Bottom 0.15: v150.69,53.19 164.12,53.19 v164.59,53.66
EPD_3V3
  Top 0.3: Q2.2 73.68,25.42 74.1,25.42 76.8,22.71 76.8,20.98 81.3,16.48 81.3,15.86 J1.16 81.3,15.72 81.3,15.38 81.27,15.34 | 81.27,15.34 78.53,12.6 76.11,12.6 71.81,8.31 71.26,8.31 TP17.TP | 129.15,43.21 129.01,43.08 123.27,43.08 116.34,36.15 100.34,36.15 C7.1 | 129.15,43.21 129.15,44.18 127.21,46.12 116.96,46.12 115.3,44.46 106.99,44.46 91,60.46 89.89,60.46 89.06,59.62 89.06,59 85.25,55.19 85.25,34.97 79.71,29.43 L1.2 | 81.27,15.34 84,12.6 102.77,12.6 109.62,5.75 147.85,5.75 159.14,17.04 165.72,17.04 167.31,18.63 167.31,25.48 167.52,25.69 167.52,26.73 152.97,41.27 131.16,41.27 129.29,43.14 129.15,43.21
EPD_3V3_C
  Top 0.3: R_CL1.2 79.22,26.25 78.18,27.29 73.68,27.29 Q2.1 73.54,27.42 57.96,27.42 35.98,49.41 | 35.98,49.41 20.36,65.03 20.36,65.37 U2.18 | 35.98,49.41 88.02,101.45 88.02,104.29 TP13.TP
EPD_BUSY  (via drill 0.3)
  Top 0.15: v84.62,13.99 84.76,14.13 84.76,15.79 J1.9 | 13.47,69.22 12.67,70.01 TP9.TP | 13.47,69.22 v13.64,69.04 | 13.47,69.22 10.18,65.93 10.18,65.44 U2.26
  Bottom 0.15: v84.62,13.99 71.53,13.99 35.46,50.07 35.46,51.45 23.13,63.78 18.91,63.78 v13.64,69.04
EPD_CS  (via drill 0.3)
  Top 0.15: v89.19,13.16 84.83,13.16 83.38,14.61 83.38,15.79 J1.12 | D6.2 v124.17,12.95 124.17,13.02 125.27,14.13 125.27,16.76 TP10.TP | v124.23,7.27 125,6.51 R9.1 | v25.07,42.94 20.36,47.65 20.36,47.92 U2.11
  Bottom 0.15: v124.23,7.27 124.23,12.95 v124.17,12.95 116.13,12.95 115.92,13.16 v89.19,13.16 89.12,13.16 87.53,11.57 73.54,11.57 42.17,42.94 v25.07,42.94
EPD_DC  (via drill 0.3)
  Top 0.15: v84.28,14.54 83.86,14.96 83.86,15.79 J1.11 | TP11.TP 92.38,12.05 v86.84,12.05 86.77,12.05 v85.52,10.8 | v17.8,42.59 12.74,47.65 12.74,47.92 U2.5
  Bottom 0.15: v84.28,14.54 84.69,14.54 86.84,12.4 v86.84,12.05 | v17.8,42.59 21.74,42.59 53.53,10.8 v85.52,10.8
EPD_RST  (via drill 0.3)
  Top 0.15: v84.69,16.62 84.35,16.27 84.35,15.86 J1.10 | v92.86,16.62 94.53,16.62 96.6,18.7 TP12.TP | v39.2,42.45 16.55,65.1 16.55,65.37 U2.21 | v58.93,22.71 71.95,22.71 v74.03,20.64
  Bottom 0.15: v92.86,16.62 v84.69,16.62 84.62,16.62 84.14,16.14 80.05,16.14 75.55,20.64 v74.03,20.64 | v58.93,22.71 v39.2,42.45
FLASH_CS  (via drill 0.3)
  Top 0.15: v121.95,7.13 121.88,7.13 121.26,6.51 R5.1 | v121.95,11.43 D9.2 121.12,12.26 v116.2,17.18 | v29.98,56.16 35.87,62.05 U1.1 35.94,62.05 v36.49,61.49 | v25.48,51.66 25.07,51.66 21.61,48.2 21.61,47.99 U2.12 | v47.37,60.04 v64.33,43.08
  Bottom 0.15: v121.95,11.43 v121.95,7.13 | v25.48,51.66 v29.98,56.16 | v116.2,17.18 106.78,17.18 80.88,43.08 v64.33,43.08 | v47.37,60.04 37.95,60.04 v36.49,61.49
GDR  (via drill 0.3)
  Top 0.15: v89.33,16.14 89.33,16.2 89.06,16.48 88.57,16.48 88.36,16.27 88.36,15.86 J1.2 | v70.22,16.55 67.1,16.55 Q3.1 66.27,15.72 63.85,15.72 62.46,14.34 R4.1
  Bottom 0.15: v89.33,16.14 84.55,16.14 84.28,15.86 70.91,15.86 v70.22,16.55
GND  (via drill 0.3, 0.35)
  Top 0.15: 24.45,107.69 23.55,107.69 22.85,108.38 21.19,108.38 20.91,108.1 17.04,108.1 9.21,100.28 C9.2 9.14,100.21 8.24,100.21 2.29,94.25 J4.G4 2.29,94.18 2.29,93.83 4.71,91.41 4.85,91.41 J4.P6 4.71,91.34 1.25,87.88 1.25,81.09 J4.G3 | 24.45,107.69 25.48,107.69 RESET_BUTTON.2 | U2.29_1 12.12,53.95 12.12,55.12 U2.29_2 12.19,55.12 13.3,55.12 U2.29_5 | U2.29_1 12.19,53.95 13.3,53.95 U2.29_4 13.37,53.95 14.54,53.95 U2.29_7 14.61,53.95 14.61,55.12 U2.29_8 14.61,55.19 14.61,56.37 U2.29_9 14.54,56.44 13.37,56.44 U2.29_6 13.3,56.44 12.12,56.44 U2.29_3 12.12,56.51 12.12,59.83 7.62,64.33 7.62,65.37 U2.28 7.62,65.44 7.62,66.76 15.44,74.58 15.44,84.07 J4.G1 15.51,84.14 15.51,85.18 16.34,86.01 16.34,88.92 | v7.62,50.21 7.62,47.99 U2.1 7.62,47.92 7.62,47.65 35.52,19.74 59.76,19.74 60.35,20.33 | v9.35,51.94 11.29,53.88 12.05,53.88 U2.29_1 | 16.34,88.92 15.51,89.75 J4.G2 | U1.4 35.94,58.31 37.88,58.31 39.75,60.18 U1.9 39.82,60.25 44.11,60.25 47.58,63.71 47.58,100.14 IC1.3 47.64,100.21 49.38,100.21 49.86,100.69 | 49.86,100.69 51.94,100.69 C_DELAY.2 52.08,100.69 62.05,100.69 68.7,107.34 68.7,108.24 68.56,108.38 67.52,108.38 66.83,107.69 66.06,107.69 CHANGE_BUTTON.2 | v49.72,107.34 50,107.61 50.76,107.61 BOOT_BUTTON.2 | v49.72,100.9 49.86,100.76 49.86,100.69 | v45.15,99.79 40.23,99.79 TP4.TP 40.16,99.72 29.36,88.92 16.34,88.92 | v24.45,107.61 24.45,107.69 | 77.01,28.74 76.8,28.95 76.8,34.63 77.91,35.73 77.91,37.47 D3.1 | 77.01,28.74 82.41,28.74 85.87,32.2 85.87,43.42 | 85.87,43.42 85.87,44.81 U3.13 | 88.74,14.23 88.02,14.96 85.8,14.96 85.32,15.44 85.32,15.79 J1.8
  Top 0.15: 88.74,14.23 89.61,13.37 89.75,13.37 J1.MP1 | 88.74,14.23 92.59,18.07 92.59,21.54 91.89,22.23 EPD_C1.2 91.89,22.3 89.82,22.3 EPD_C5.2 89.75,22.3 87.88,22.3 EPD_C6.2 87.81,22.3 84.97,22.3 EPD_C7.2 84.9,22.3 81.44,22.3 EPD_C8.2 81.37,22.37 79.71,22.37 EPD_C9.2 79.64,22.3 78.05,22.3 EPD_C10.2 77.97,22.23 v77.35,21.61 | J1.17 80.75,15.79 80.75,15.38 78.74,13.37 76.31,13.37 J1.MP2 76.24,13.3 73.27,13.3 73.06,13.09 EPD_C12.2 73.06,13.16 72.3,13.92 | 75.48,21.47 72.3,18.28 72.3,13.92 | 75.48,21.47 76.04,22.02 76.04,22.23 EPD_C11.2 | 63.5,13.64 63.5,11.98 61.56,10.04 61.56,9.9 SJ1.1 61.56,9.84 61.56,9.7 62.39,8.87 63.78,8.87 64.26,9.35 65.16,9.35 R2.1 65.23,9.42 65.93,9.42 70.43,13.92 72.3,13.92 | 63.5,13.64 63.5,14.27 R4.2 | 60.35,20.33 61.63,19.05 61.63,13.85 61.84,13.64 63.5,13.64 | 60.35,20.33 59.21,21.47 59.21,21.61 EPD_C2.2 | 75.48,21.47 v75.34,21.61 | v77.01,27.84 77.01,28.74 | D12.1 110.18,10.73 113.92,10.73 D11.1 113.99,10.73 115.72,10.73 | 115.72,10.73 117.45,10.73 D10.1 117.52,10.73 121.12,10.73 D9.1 121.19,10.73 124.93,10.73 D6.1 125,10.73 128.94,10.73 D8.1 | C1_BAT2.2 128.39,42.38 125.07,42.38 124.51,41.83 C3.- 124.44,41.76 122.5,41.76 115.79,35.04 115.72,35.04 | 115.72,35.04 100.34,35.04 C7.2 100.27,35.04 99.58,35.73 99.58,36.56 102.7,39.68 104.84,39.68 TP5.TP 104.91,39.75 117.1,39.75 118.83,41.48 118.97,41.48 C1_BAT1.2 v119.04,43.21 | 115.72,35.04 115.72,10.73 | 116.62,44.04 117.03,44.04 117.45,44.46 IC4.2 | 116.62,44.04 114.54,44.04 114.33,43.84 113.22,43.84 R1_PWRUSB.1 113.15,43.77 99.86,43.77 99.72,43.63 C10_SUPERCAP.1 99.65,43.63 99.58,43.7 94.8,43.7 C8.2 94.73,43.7 94.46,43.42 v93.9,43.42
  Top 0.15: 120.81,50.73 122.85,48.68 124.1,48.68 R2_BAT.1 | 120.81,50.73 117.17,54.36 115.23,54.36 C1_BAT.2 | U4.4 134.28,56.02 134.62,56.02 135.18,56.58 135.18,56.72 U4.9 | U4.9 135.25,56.79 134.62,57.41 134.28,57.41 U4.1 134.21,57.41 133.86,57.41 133.31,56.85 127.07,56.85 | U4.9 135.18,56.51 136.22,56.51 U4.6 136.28,56.44 137.39,56.44 141.62,52.22 146.81,52.22 D1.2 | 127.07,56.85 126.45,56.85 C2_BAT.2 | 125.17,53.43 125.14,53.46 125.14,57.96 125.9,58.73 126.94,58.73 127.07,58.59 127.07,56.85 | 125.17,53.43 125.69,52.91 125.9,52.91 MCP73831.2 | v122.92,52.84 120.81,50.73 | 125.17,53.43 v124.58,52.84 | v116.62,45.01 116.62,44.04 | C2.2 155.6,4.99 156.99,4.99 C1.2 156.99,5.06 157.68,5.75 157.68,11.43 | 157.68,11.43 158.44,11.43 158.93,10.94 160.52,10.94 160.73,11.15 160.73,11.77 160.31,12.19 160.04,12.19 SENSOR2.7 159.97,12.33 159.69,12.33 159.28,12.74 159.28,13.37 159.76,13.85 159.97,13.85 SENSOR2.5 160.04,13.85 v160.87,13.85 | 157.68,11.43 157.13,11.43 SENSOR2.1 | v163.91,17.66 164.95,17.66 J3.1 | J2.B12 163.22,50.76 163.22,50.55 J2.A1 163.22,50.41 163.22,49.31 163.78,48.75 J2.MP3 | J2.MP3 163.84,48.75 167.72,48.75 J2.MP1 167.72,48.82 167.72,58.93 J2.MP2 | C5_USB.2 147.71,49.17 C4_USB.2 147.71,49.24 147.71,51.59 147.16,52.15 146.88,52.15 D1.2 | J2.A12 163.22,57.13 163.22,56.92 J2.B1 163.15,56.92 160.87,56.92 154.98,51.04 154.91,51.04 | 154.91,51.04 154.77,51.18 154.5,51.18 151.45,54.22 151.45,55.05 152.14,55.75 152.14,55.95 R2-USB.2 152.21,56.02 155.12,58.93 163.78,58.93 J2.MP4 | 154.91,51.04 154.91,50 154.77,49.86 | 154.77,49.86 153.67,49.86 153.04,50.48 R2-USB1.1 152.97,50.55 152.97,51.52 150.83,53.67 148.61,53.67 147.16,52.22 D1.2
  Top 0.15: 156.57,41.34 163.78,48.55 163.78,48.68 J2.MP3 | 156.57,41.34 154.91,41.34 154.77,41.48 154.77,49.86 | v163.91,33.93 156.57,41.27 156.57,41.34 | v86.15,43.42 85.87,43.42
  Bottom 0.15: v9.35,51.94 v7.62,50.21 | v45.15,99.79 48.54,99.79 49.65,100.9 v49.72,100.9 v49.72,107.34 49.65,107.34 49.38,107.61 v24.45,107.61 | v75.34,21.61 77.01,21.61 | 77.01,21.61 v77.35,21.61 | 77.01,21.61 v77.01,27.84 | v124.58,52.84 v122.92,52.84 120.15,52.84 116.62,49.31 v116.62,45.01 116.69,45.01 118.49,43.21 v119.04,43.21 | v160.87,13.85 163.91,16.9 v163.91,17.66 v163.91,33.93 | v93.9,43.42 v86.15,43.42
  other vias: 38.55,50.45 55.05,53.65 50.3,58.55 86.55,58.4 62.7,20 102,13.95 115.85,9.15 139.65,53 86.35,25.1 9.65,67.55 15.35,68.5 32.1,56.85 30.05,49.7 39.15,44.6 24.9,45.15 12.45,45.85 22.8,72.75 47.05,104.05 57.65,107.9 33.05,61.85 165.5,13.8 15.9,51.65 21.15,49.65 21.5,45.35 16.1,45.85 5.1,71.5 19.75,59.8
  pour Top: 73.96,9.91 73.98,9.93 92.22,9.93 92.24,9.91 92.26,9.89 92.28,9.87 92.28,0.08 170.12,0.08 170.12,67.12 92.18,67.12 92.16,67.14 92.14,67.16 92.12,67.18 92.12,111.12 69.08,111.12 69.08,109.93 69.06,109.91 69.04,109.89 69.02,109.87 19.98,109.87 19.96,109.89 19.94,109.91 19.92,109.93 19.92,111.12 0.08,111.12 0.08,66.98 6.37,66.98 6.39,66.96 6.41,66.94 6.43,66.92 6.43,46.18 6.41,46.16 6.39,46.14 6.37,46.12 0.08,46.12 0.08,0.08 73.92,0.08 73.92,9.87 73.94,9.89
  pour Bottom: 73.96,9.91 73.98,9.93 92.22,9.93 92.24,9.91 92.26,9.89 92.28,9.87 92.28,0.08 170.12,0.08 170.12,67.12 92.18,67.12 92.16,67.14 92.14,67.16 92.12,67.18 92.12,111.12 69.08,111.12 69.08,109.93 69.06,109.91 69.04,109.89 69.02,109.87 19.98,109.87 19.96,109.89 19.94,109.91 19.92,109.93 19.92,111.12 0.08,111.12 0.08,66.98 6.37,66.98 6.39,66.96 6.41,66.94 6.43,66.92 6.43,46.18 6.41,46.16 6.39,46.14 6.37,46.12 0.08,46.12 0.08,0.08 73.92,0.08 73.92,9.87 73.94,9.89
GPIO8
  Top 0.15: R1.2 19.25,43.28 19.25,47.71 19.04,47.92 U2.10
I2C_PW  (via drill 0.3)
  Top 0.15: C2.1 155.6,6.3 156.99,6.3 C1.1 156.99,6.37 v156.99,9.35 | v27.15,63.99 22.78,63.99 21.61,65.16 21.61,65.37 U2.17
  Bottom 0.15: v156.99,9.35 164.4,16.76 164.4,34.07 134.48,63.99 v27.15,63.99
IC2_PW
  Top 0.15: R2_PINH.2 158.65,6.3 160.04,6.3 R1_PINH.2 160.04,6.37 161.01,7.34 161.01,12.26 160.24,13.02 160.04,13.02 SENSOR2.6
INT_RTC  (via drill 0.3)
  Top 0.15: v90.44,54.92 93.63,54.92 R1_PINH1.1 | v87.39,55.54 87.39,54.36 U3.3 | v28.95,52.08 28.88,52.15 20.43,52.15 16.55,48.27 16.55,47.99 U2.8 | v36.77,54.64 v34.21,52.08 | v94.8,57.41 106.44,57.41 TP15.TP
  Bottom 0.15: v34.21,52.08 v28.95,52.08 | v36.77,54.64 86.42,54.64 87.32,55.54 v87.39,55.54 88.02,54.92 v90.44,54.92 90.51,54.92 93,57.41 v94.8,57.41
IO/BOOT  (via drill 0.3)
  Top 0.15: 45.22,106.85 51.52,106.85 51.73,107.06 51.73,108.03 52.35,108.65 52.35,108.86 R_BOOT.2 | 45.22,106.85 44.94,107.13 44.94,109.35 45.08,109.48 46.95,109.48 47.23,109.21 BOOT_BUTTON.4 | v24.17,85.73 24.17,65.44 U2.15 | v45.22,106.78 45.22,106.85
  Bottom 0.15: v45.22,106.78 v24.17,85.73
IO/CHANGE  (via drill 0.3)
  Top 0.15: v67.1,109.14 68,109.14 R_CHANGE.2 | v63.57,109.14 62.53,109.14 CHANGE_BUTTON.4 | v23.68,75.41 13.99,65.72 13.99,65.44 U2.23
  Bottom 0.15: v67.1,109.14 v63.57,109.14 63.5,109.14 29.78,75.41 v23.68,75.41
MISO  (via drill 0.3)
  Top 0.15: v8.1,92.52 5.12,92.52 J4.P7 | v15.03,99.44 15.86,99.44 16.27,99.86 TP6.TP | v109.42,7.13 109.48,7.13 110.11,6.51 R8.1 | v109.42,11.43 110.11,12.12 D12.2 110.11,12.19 v94.8,27.49 | 36.98,61.7 36.98,61.98 35.66,63.3 v22.85,63.3 | 36.98,61.7 36.98,61.36 36.49,60.87 35.94,60.87 U1.2 | v15.93,63.3 10.73,63.3 8.93,65.1 8.93,65.37 U2.27 | v61.49,61.7 v80.61,42.59 | v37.12,61.7 36.98,61.7
  Bottom 0.15: v15.03,99.44 v8.1,92.52 8.1,71.19 15.93,63.37 v15.93,63.3 v22.85,63.3 | v109.42,11.43 v109.42,7.13 | v94.8,27.49 94.8,28.39 v80.61,42.59 | v37.12,61.7 v61.49,61.7
MOSI  (via drill 0.3)
  Top 0.15: v113.22,7.2 R7.1 | v113.22,11.5 113.92,12.19 D11.2 113.92,12.26 113.92,13.23 93.63,33.52 88.78,33.52 | v85.11,19.74 82.34,16.97 82.34,15.86 J1.14 | v89.26,29.36 89.06,29.36 88.78,29.64 88.78,33.52 | 88.78,37.12 88.78,33.52 | 88.78,37.12 89.89,38.23 TP7.TP | 35.28,51.49 v34.97,51.18 | 35.28,51.49 42.03,58.24 43.63,58.24 U1.5 | v18.21,51.18 15.23,48.2 15.23,47.99 U2.7 | v4.36,87.33 5.05,88.02 J4.P3 | v88.36,37.12 88.78,37.12 | 35.28,51.49 v35.94,50.83
  Bottom 0.15: v113.22,11.5 v113.22,7.2 | v85.11,19.74 85.11,25.21 v89.26,29.36 | v34.97,51.18 v18.21,51.18 18.21,60.39 4.36,74.24 v4.36,87.33 | v88.36,37.12 87.25,37.12 80.81,43.56 43.21,43.56 v35.94,50.83
N$1
  Top 0.15: R2-USB.1 152.21,54.71 158.24,54.71 161.08,57.55 164.4,57.55 164.95,56.99 164.95,56.51 164.05,55.61 163.29,55.61 J2.B5
N$2
  Top 0.15: R2-USB1.2 154.29,50.55 154.29,50.97 151.17,54.09 151.17,56.09 155.33,60.25 164.95,60.25 165.32,59.88 165.32,52.67 165.07,52.42 164.21,52.42 164.07,52.56 163.27,52.56 J2.A5
N$3  (via drill 0.3)
  Top 0.15: v117.03,42.04 117.52,41.55 117.72,41.55 C1_BAT1.1 | D2.1 115.09,43.35 116.34,43.35 116.55,43.14 v116.62,43.14 117.1,43.14 117.45,43.49 IC4.3 117.52,43.49 118.14,44.11 118.14,44.88 118,45.01 117.93,45.01 117.52,45.43 IC4.1 | v131.02,49.45 132.13,49.45 Q1.2
  Bottom 0.15: 117.03,42.73 v117.03,42.04 | v116.62,43.14 117.03,42.73 | v131.02,49.45 125.9,49.45 119.18,42.73 117.03,42.73
N$4
  Top 0.15: C10.1 60.45,108.86 61.22,108.86 61.7,108.38 65.23,108.38 66,109.14 CHANGE_BUTTON.3
N$5  (via drill 0.3)
  Top 0.15: C4.1 95.98,29.99 94.18,29.99 93.69,29.5 90.23,29.5 89.61,30.12 D4.1 89.54,30.19 v89.54,33.03 | v84.69,37.47 81.44,37.47 D3.2
  Bottom 0.15: v84.69,37.47 85.11,37.47 v89.54,33.03
N$6
  Top 0.15: C10.2 60.45,107.61 62.46,107.61 CHANGE_BUTTON.1
N$7
  Top 0.15: SENSOR2.8 159.97,11.5 158.79,11.5 158.1,12.19 157.13,12.19 SENSOR2.2
N$8
  Top 0.15: R2_BAT.2 124.1,50 124.1,51.18 123.4,51.87 MCP73831.5
N$9
  Top 0.15: J1.24 77.28,15.79 74.44,15.79 73.06,14.41 EPD_C12.1
N$10  (via drill 0.3)
  Top 0.15: v120.29,52.35 119.46,53.19 R1_BAT.1 | v125,52.35 125.48,52.35 125.9,51.94 MCP73831.1
  Bottom 0.15: v125,52.35 v120.29,52.35
N$11
  Top 0.15: CHG_LED.C 119.25,54.43 119.46,54.43 120.63,53.25 R1_BAT.2
N$12
  Top 0.15: C_DELAY.1 51.94,102.01 50.55,102.01 50.48,102.08 IC1.5
N$13  (via drill 0.3)
  Top 0.15: v78.32,18.7 78.32,15.86 J1.22 | v78.74,19.81 78.74,19.95 78.05,20.64 78.05,20.91 EPD_C10.1
  Bottom 0.15: v78.32,18.7 78.32,19.39 v78.74,19.81
N$14  (via drill 0.3)
  Top 0.15: v89.12,57.69 90.09,56.72 R_CAPACITOR.2 | v88.16,58.86 88.16,59.56 88.29,59.69 D7.1
  Bottom 0.15: v89.12,57.69 89.12,57.89 v88.16,58.86
N$15  (via drill 0.3)
  Top 0.15: v79.36,17.66 79.36,15.86 J1.20 | v81.37,19.67 81.37,20.98 EPD_C8.1
  Bottom 0.15: v81.37,19.67 v79.36,17.66
N$16  (via drill 0.3)
  Top 0.15: v79.84,16.97 79.84,15.86 J1.19 | v83.79,20.91 84.9,20.91 EPD_C7.1
  Bottom 0.15: v83.79,20.91 v79.84,16.97
N$17
  Top 0.15: J1.4 87.32,15.86 87.32,16.41 91.89,20.98 EPD_C1.1
N$18
  Top 0.15: R_RESET.2 26.38,108.38 23.27,108.38 22.51,109.14 22.02,109.14 RESET_BUTTON.4
N$19  (via drill 0.3)
  Top 0.15: v80.33,16.62 80.33,15.86 J1.18 | v86.98,20.71 87.53,20.71 87.81,20.98 EPD_C6.1
  Bottom 0.15: v80.33,16.62 82.89,16.62 v86.98,20.71
N$20  (via drill 0.3)
  Top 0.15: v78.74,21.61 90.23,21.61 90.44,21.4 90.44,20.5 86.84,16.9 86.84,15.86 J1.5 | v71.47,21.12 67.86,21.12 66.76,22.23 58.66,22.23 58.52,22.09 58.52,20.98 59.14,20.36 EPD_C2.1
  Bottom 0.15: v78.74,21.61 77.97,21.61 77.49,21.12 v71.47,21.12
N$21
  Top 0.15: J1.15 81.85,15.86 81.85,17.11 84.97,20.22 89.06,20.22 89.75,20.91 EPD_C5.1
N$23
  Top 0.15: C6.2 45.64,107.61 47.23,107.61 BOOT_BUTTON.1
N$24
  Top 0.15: C5.2 20.57,107.55 21.88,107.55 21.95,107.61 RESET_BUTTON.1
N$25
  Top 0.15: C6.1 45.64,108.86 46.05,108.86 46.54,108.38 50,108.38 50.76,109.14 BOOT_BUTTON.3
N$26  (via drill 0.3)
  Top 0.15: v19.67,108.86 20.5,108.86 C5.1 | v24.45,108.86 25.21,108.86 25.48,109.14 RESET_BUTTON.3
  Bottom 0.15: v24.45,108.86 v19.67,108.86
PREVGL  (via drill 0.3)
  Top 0.15: J1.21 78.81,15.79 78.81,15.44 78.6,15.24 78.05,15.24 77.84,15.44 77.84,15.79 J1.23 77.77,15.86 77.77,16.27 76.11,17.94 76.11,20.29 | 76.11,20.29 76.11,20.91 EPD_C11.1 | v78.88,20.43 79.43,20.98 79.64,20.98 EPD_C9.1 | 76.11,20.29 v76.73,20.29 | v84.76,26.25 89.47,26.25 D5.1 | v90.51,30.12 93,30.12 D4.2
  Bottom 0.15: v76.73,20.29 76.87,20.43 v78.88,20.43 78.94,20.43 v84.76,26.25 84.83,26.25 88.71,30.12 v90.51,30.12
RESE  (via drill 0.3)
  Top 0.15: v89.33,15.51 89.06,15.24 88.02,15.24 87.88,15.38 87.88,15.79 J1.3 | v70.64,15.51 67.86,15.51 67.66,15.72 Q3.2 67.86,15.44 66.48,14.06 66.48,12.4 R3.1
  Bottom 0.15: v70.64,15.51 v89.33,15.51
RESE'
  Top 0.15: SJ1.2 63.09,9.9 63.85,10.66 65.16,10.66 R2.2 65.23,10.73 65.93,10.73 67.52,12.33 67.73,12.33 R3.2
RESET  (via drill 0.3)
  Top 0.15: v43.56,105.75 47.16,102.14 47.58,102.14 IC1.1 | v9.83,49.1 9.83,48.27 10.11,47.99 U2.3
  Bottom 0.15: v43.56,105.75 20.71,105.75 3.88,88.92 3.88,69.39 5.96,67.31 6.44,67.31 9.83,63.92 v9.83,49.1
RTC_RST  (via drill 0.3)
  Top 0.15: v42.59,64.47 23.55,64.47 22.85,65.16 22.85,65.37 U2.16 | v80.12,54.15 v69.8,64.47 | v85.8,52.7 85.8,54.02 85.87,54.09 U3.4
  Bottom 0.15: v69.8,64.47 v42.59,64.47 | v80.12,54.15 84.35,54.15 v85.8,52.7
RX
  Top 0.15: U2.24 12.74,65.44 12.74,67.52 19.6,74.38 19.6,86.01 TP2.TP
SCK  (via drill 0.3)
  Top 0.15: v82.82,15.03 82.82,15.79 J1.13 | v116.27,13.44 117.45,12.26 D10.2 117.52,12.19 v118.35,11.36 | v118.35,7.13 117.66,6.44 R6.1 | v45.36,59.56 43.7,59.56 U1.6 | v61.7,59.56 75.34,45.91 TP8.TP 75.41,45.84 v78.67,42.59 | v16.41,64.27 16.41,62.81 | 16.41,62.81 16.41,54.64 13.99,52.22 13.99,47.99 U2.6 | v6.23,68.28 3.88,70.64 3.88,89.61 4.5,90.23 5.05,90.23 J4.P5 | 16.41,62.81 v10.87,62.81
  Bottom 0.15: 93.35,15.03 114.68,15.03 v116.27,13.44 | 93.35,15.03 v82.82,15.03 | v118.35,11.36 v118.35,7.13 | v61.7,59.56 v45.36,59.56 30.95,59.56 20.98,69.53 13.5,69.53 13.16,69.18 13.16,68.91 16.41,65.65 v16.41,64.27 | v6.23,68.28 6.23,67.94 10.87,63.3 v10.87,62.81 | 93.35,15.03 93.35,28.6 84.97,36.98 84.28,36.98 v78.67,42.59
SCL  (via drill 0.3)
  Top 0.15: 157.61,14.34 161.01,14.34 161.35,13.99 161.35,6.44 160.59,5.68 159.69,5.68 159,4.99 158.65,4.99 R2_PINH.1 | 157.61,14.34 157.13,13.85 SENSOR2.4 | v136.98,56.92 136.28,56.92 U4.7 | v162.32,21.12 164.54,21.12 164.95,20.71 J3.4 | v157.61,14.75 157.61,14.34 | v19.32,64.27 18.7,64.27 17.8,65.16 17.8,65.37 U2.20 | v80.12,44.04 v68.56,55.61 | v90.44,43.91 89.75,44.6 89.75,44.81 U3.16
  Bottom 0.15: 136.98,46.47 v136.98,56.92 | 136.98,46.47 v162.32,21.12 162.32,21.05 157.61,16.34 v157.61,14.75 | v19.32,64.27 19.8,64.75 25.35,64.75 34.49,55.61 v68.56,55.61 | v80.12,44.04 90.3,44.04 v90.44,43.91 94.04,43.91 94.39,43.56 94.39,43.14 95.98,41.55 118.42,41.55 123.33,46.47 136.98,46.47
SDA  (via drill 0.3)
  Top 0.15: R1_PINH.1 160.04,4.92 159.69,4.92 159.14,4.36 155.05,4.36 154.84,4.57 154.84,11.08 156.78,13.02 157.06,13.02 SENSOR2.3 157.13,13.09 157.34,13.09 v158.1,13.85 | v141.75,52.7 141.75,52.77 137.12,57.41 136.28,57.41 U4.8 | v163.43,20.64 163.71,20.64 164.61,19.74 164.95,19.74 J3.3 | v19.94,64.27 19.04,65.16 19.04,65.37 U2.19 | v90.44,44.53 90.92,44.04 90.92,43.77 90.58,43.42 89.54,43.42 88.5,44.46 88.5,44.81 U3.15
  Bottom 0.15: v158.1,13.85 158.1,15.24 163.43,20.57 v163.43,20.64 141.75,42.31 v141.75,52.7 141.75,52.77 137.12,57.41 103.39,57.41 90.51,44.53 v90.44,44.53 42.87,44.53 23.13,64.27 v19.94,64.27
SRC  (via drill 0.3)
  Top 0.15: 94.01,27.32 93,26.32 D5.2 | 94.01,27.32 95.36,28.67 95.98,28.67 C4.2 | v67.03,21.33 67.03,17.94 Q3.3 | v79.26,32.81 79.66,33.2 L1.1 | v92.31,29.02 94.01,27.32
  Bottom 0.15: v67.03,21.33 67.78,21.33 v79.26,32.81 88.52,32.81 v92.31,29.02
SS_SD  (via drill 0.3)
  Top 0.15: v129.77,7.2 129.08,6.51 R10.1 | v129.77,11.5 129.01,12.26 D8.2 | v11.36,53.32 11.36,47.99 U2.4 | v6.23,68.91 6.23,86.29 5.54,86.98 J4.P2
  Bottom 0.15: v129.77,11.5 v129.77,7.2 124.79,7.2 124.23,6.65 95.91,6.65 91.27,11.29 53.46,11.29 11.43,53.32 v11.36,53.32 11.36,63.78 v6.23,68.91
TX  (via drill 0.3)
  Top 0.15: v11.43,66.55 11.43,65.44 U2.25 | v4.5,69.39 3.39,69.39 3.19,69.6 TP1.TP
  Bottom 0.15: v11.43,66.55 9.21,66.55 6.37,69.39 v4.5,69.39
USB_D+  (via drill 0.3)
  Top 0.15: v135.59,59.35 141.75,53.19 146.81,53.19 D1.1 | v34.56,56.16 v32.27,53.88 | v27.84,51.66 24.17,47.99 U2.14
  Bottom 0.15: v135.59,59.35 62.12,59.35 58.93,56.16 v34.56,56.16 | v32.27,53.88 30.05,53.88 v27.84,51.66
USB_D-  (via drill 0.3)
  Top 0.15: v143.76,51.31 146.81,51.31 D1.3 | v31.02,55.12 v32.89,55.12 | v26.32,51.66 22.85,48.2 22.85,47.99 U2.13
  Bottom 0.15: v143.76,51.31 137.18,57.89 89.96,57.89 88.09,56.02 69.6,56.02 68.7,55.12 v32.89,55.12 | v31.02,55.12 29.78,55.12 v26.32,51.66
VBAT
  Top 0.3: U4.2 134.28,56.92 134.28,56.51 U4.3 134.14,56.44 133.79,56.44 131.23,53.88 131.23,51.8 Q1.3 | Q1.3 131.16,51.66 128.46,51.66 126.31,53.81 125.97,53.81 MCP73831.3 125.9,53.95 125.62,54.22 125.62,57.34 126.38,58.1 C2_BAT.1 | TP3.TP 138.01,46.05 137.05,46.05 131.37,51.73 Q1.3
VBUS
  Top 0.3: D1.5 149.3,52.15 148.89,52.15 148.47,51.73 148.47,49.79 148.96,49.31 C4_USB.1 149.03,49.17 C5_USB.1 149.09,47.3 149.09,45.57 | 149.09,45.57 151.24,43.42 PFMF.050.1.2 | 113.99,45.15 114.75,45.15 115.02,45.43 D2.2 | 113.99,45.15 113.22,45.15 R1_PWRUSB.2 | 114.75,55.19 113.99,54.43 C1_BAT.1 113.99,54.29 113.99,45.15 | 114.75,55.19 120.01,55.19 120.63,54.57 CHG_LED.A 120.77,54.43 122.78,54.43 123.33,53.88 MCP73831.4 123.33,53.67 123.33,53.25 127.07,49.52 130.19,49.52 Q1.1 130.33,49.38 135.04,44.67 138.57,44.67 139.4,45.5 148.96,45.5 149.09,45.57 | TP14.TP 114.26,63.85 114.26,55.75 114.68,55.33 114.75,55.19
VRTC
  Top 0.3: C10_SUPERCAP.2 99.65,45.77 98.96,45.08 94.8,45.08 C8.1 94.67,45.15 91.13,45.15 90.09,46.19 87.81,46.19 | 87.81,46.19 87.81,45.5 87.19,44.88 U3.14 | 87.81,46.19 87.81,55.19 88.85,56.23 88.85,56.65 R_CAPACITOR.1
VUSB
  Top 0.3: J2.A4 163.22,51.31 163.22,51.52 J2.B9 163.08,51.59 162.6,51.59 | J2.A9 163.22,56.37 163.22,56.09 J2.B4 163.08,56.02 162.53,56.02 161.72,55.22 161.72,52.47 162.6,51.59 | 162.6,51.59 162.53,51.45 162.53,51.25 155.81,44.53 155.81,43.42 PFMF.050.1.1